# EAGLE board module (EAGLE 7.7.0)
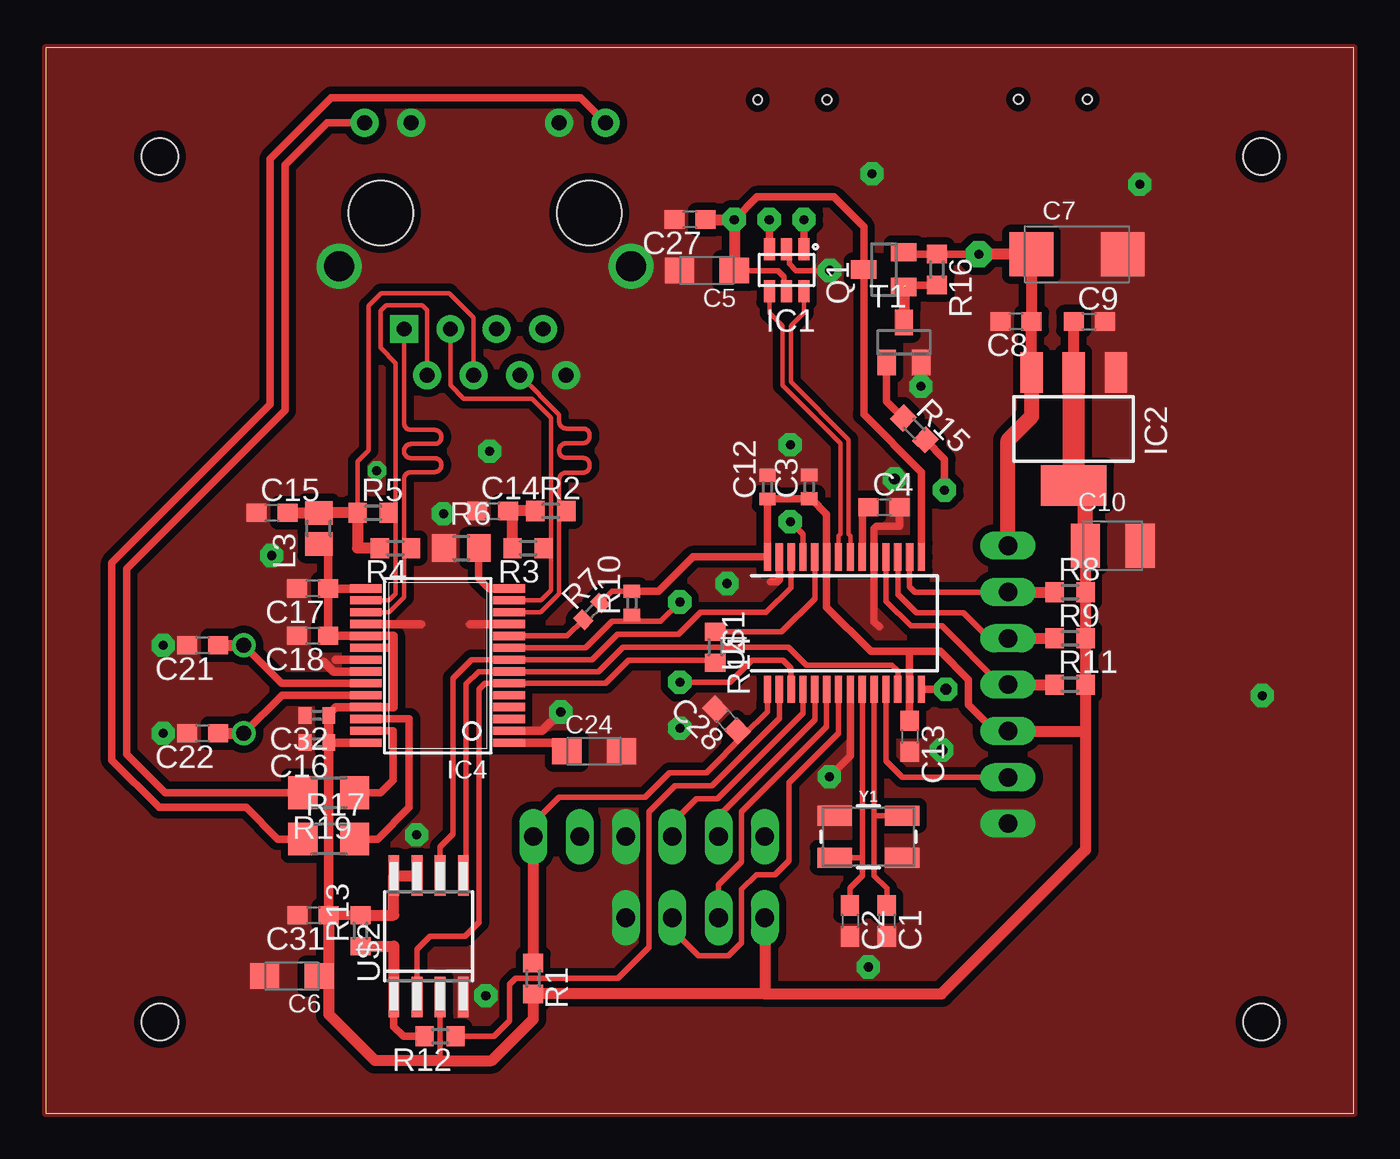
[diagram p0: board, top side]
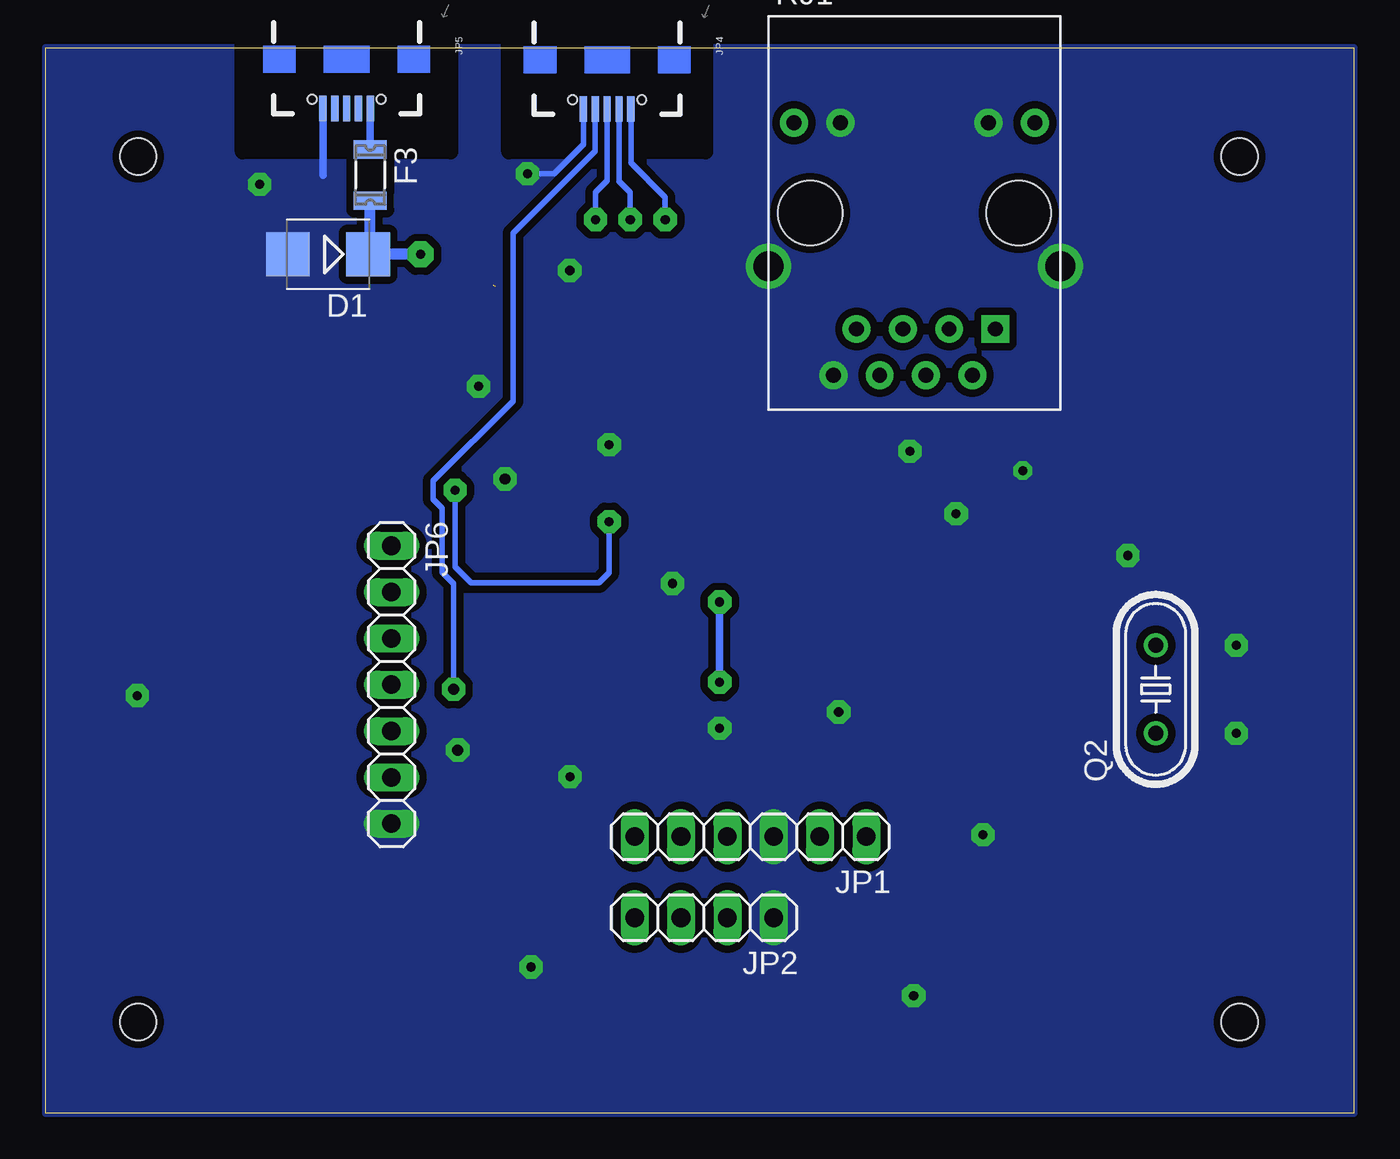
[diagram p1: board, bottom side, seen from below]

Size 71.75 x 58.42 mm. Coordinates in mm from the lower left corner, seen from the top.
Outline: 0,0 71.75,0 71.75,58.42 0,58.42 0,0
Copper layers (1*16): Top 0.035mm / dielectric 1.5mm / Bottom 0.035mm
Design rules "default *": minimum track width 10mil, minimum drill 24mil, track to track 8mil, track to pad 8mil, pad to pad 8mil, via to via 8mil, smd to smd 8mil, copper to edge 0mil, drill to drill 8mil, minimum pad ring 10mil, minimum via ring 8mil, stop-mask expansion 4mil, vias tented up to drill 0mil, thermal gap 10mil
Holes 2 mm at 6.27,52.45 6.27,5 66.68,5 66.68,52.45
tRestrict: area 16.6,20.1 to 18.4,29; area 24.5,20.1 to 26.3,29; area 39.4,29.7 to 48.2,31.3; area 39.4,22.5 to 48.2,24; area 40.3,46.9 to 40.9,47.9
bRestrict: area 35.6,52.7 to 46.4,58.4; area 49.5,52.7 to 61,58.4

## Footprints (pad centres in the part's own frame; a part is rotated, then mirrored left to right if it is on the bottom)
C0603 = smd 1.1 x 1: 1 -0.85,0; 2 0.85,0
C0402 = smd 0.7 x 0.9: 1 -0.65,0; 2 0.65,0
SMC_A = smd 1.6 x 1.4: + -1.5,0; - 1.5,0
SMC_C = smd 2.4 x 2.4: + -2.5,0; - 2.5,0
SMC_B = smd 1.6 x 2.4: + -1.5,0; - 1.5,0
SMB = smd 2.4 x 2.4: A 2.2,0; C -2.2,0
1206L = smd 1 x 1.8: 1 -1.4,0; 2 1.4,0
SOT-23-6L = smd 0.6 x 1.2: 1 -0.95,-2.3; 2 0,-2.3; 3 0.95,-2.3; 4 0.95,0; 5 0,0; 6 -0.95,0
SOT223 = smd 1.219 x 2.235: 1 -2.311,-3.099; 2 0,-3.099; 3 2.311,-3.099 | smd 3.6 x 2.2: TAB 0,3.099
TSSOP28W = smd 0.45 x 1.75: P$1 0,-0.65; P$2 0.65,-0.65; P$3 1.3,-0.65; P$4 1.95,-0.65; P$5 2.6,-0.65; P$6 3.25,-0.65; P$7 3.9,-0.65; P$8 4.55,-0.65; P$9 5.2,-0.65; P$10 5.85,-0.65; P$11 6.5,-0.65; P$12 7.15,-0.65; P$13 7.8,-0.65; P$14 8.45,-0.65; P$15 8.45,7.2; P$16 7.8,7.2; P$17 7.15,7.2; P$18 6.5,7.2; P$19 5.85,7.2; P$20 5.2,7.2; P$21 4.55,7.2; P$22 3.9,7.2; P$23 3.25,7.2; P$24 2.6,7.2; P$25 1.95,7.2; P$26 1.3,7.2; P$27 0.65,7.2; P$28 0,7.2
1X06 = drill 1.016 long: 1 -6.35,0; 2 -3.81,0; 3 -1.27,0; 4 1.27,0; 5 3.81,0; 6 6.35,0
1X04 = drill 1.016 long: 1 -3.81,0; 2 -1.27,0; 3 1.27,0; 4 3.81,0
USB-B-MICRO-SMD_V03 = smd 1.4 x 0.4: D+1 2.7,0; D-1 2.7,0.65; GND1 2.7,-1.3; ID1 2.7,-0.65; VBUS1 2.7,1.3 | hole 0.5: 2.2,1.9; 2.2,-1.9
1X07 = drill 1.016 long: 1 -7.62,0; 2 -5.08,0; 3 -2.54,0; 4 0,0; 5 2.54,0; 6 5.08,0; 7 7.62,0
FB805 = smd 1.3 x 1.5: 1 -0.85,0; 2 0.85,0
SOT23 = smd 1 x 1.4: 1 -0.95,-1.1; 2 0.95,-1.1; 3 0,1.1
HC49/S = drill 0.813: 1 -2.413,0; 2 2.413,0
R0603 = smd 1 x 1.1: 1 -0.85,0; 2 0.85,0
R0805 = smd 1.3 x 1.5: 1 -0.95,0; 2 0.95,0
R0402 = smd 0.7 x 0.9: 1 -0.65,0; 2 0.65,0
R1206 = smd 1.6 x 1.803: 1 -1.422,0; 2 1.422,0
HR911105A = drill 0.813 pad 1.524: G+ 4.953,-6.604; G- 4.953,-4.064; GND -8.89,4.445; NC -6.35,3.175; P4 -8.89,-0.635; P5 -6.35,0.635; RD+ -6.35,-1.905; RD- -8.89,1.905; TD- -8.89,-3.175; Y+ 4.953,6.604; Y- 4.953,4.064 | drill 1.651 pad 2.159: SHIELD0 -2.921,8.001; SHIELD1 -2.921,-8.001 | drill 0.813 pad 1.524 square: TD+ -6.35,-4.445 | hole 3.556: 0,-5.715; 0,5.715
SSOP28 = smd 0.4 x 1.5: 1 -4.225,-3.625; 2 -3.575,-3.625; 3 -2.925,-3.625; 4 -2.275,-3.625; 5 -1.625,-3.625; 6 -0.975,-3.625; 7 -0.325,-3.625; 8 0.325,-3.625; 9 0.975,-3.625; 10 1.625,-3.625; 11 2.275,-3.625; 12 2.925,-3.625; 13 3.575,-3.625; 14 4.225,-3.625; 15 4.225,3.625; 16 3.575,3.625; 17 2.925,3.625; 18 2.275,3.625; 19 1.625,3.625; 20 0.975,3.625; 21 0.325,3.625; 22 -0.325,3.625; 23 -0.975,3.625; 24 -1.625,3.625; 25 -2.275,3.625; 26 -2.925,3.625; 27 -3.575,3.625; 28 -4.225,3.625
SO-08M = smd 0.6 x 2.2: 1 -1.905,-3.33; 2 -0.635,-3.33; 3 0.635,-3.33; 4 1.905,-3.33; 5 1.905,3.33; 6 0.635,3.33; 7 -0.635,3.33; 8 -1.905,3.33
CRYSTAL-SMD-5X3.2-4PAD = smd 1.9 x 1.1: 1 -1.85,-1.15; 2 1.85,-1.15; 3 1.85,1.15; 4 -1.85,1.15

## Placement (x,y rotation side)
C1  [C0603]  46.13,10.54 270 top
C2  [C0603]  44.11,10.54 270 top
C3  [C0402]  41.88,34.34 90 top
C4  [C0603]  45.99,33.22 0 top
C5  [SMC_A]  36.27,46.2 180 top
C6  [SMC_A]  13.51,7.52 180 top
C7  [SMC_C]  56.57,47.09 0 top
C8  [C0603]  53.23,43.41 180 top
C9  [C0603]  57.24,43.41 0 top
C10  [SMC_B]  58.52,31.11 0 top
C12  [C0402]  39.59,34.33 90 top
C13  [C0603]  47.39,20.67 270 top
C14  [C0603]  24.51,33.02 0 top
C15  [C0603]  12.42,32.92 0 top
C16  [C0402]  14.88,20.32 180 top
C17  [C0603]  14.66,28.77 180 top
C18  [C0603]  14.65,26.18 180 top
C21  [C0603]  8.61,25.65 180 top
C22  [C0603]  8.61,20.83 180 top
C24  [SMC_A]  30.08,19.85 0 top
C27  [C0603]  35.33,49 180 top
C28  [C0603]  37.35,21.56 135 top
C31  100nF  [C0603]  14.68,10.86 180 top
C32  [C0402]  14.88,21.82 180 top
D1  [SMB]  56.26,47.09 180 bottom
F3  1206L012  [1206L]  53.95,51.44 270 bottom
IC1  IC_USBLC6-2  [SOT-23-6L]  40.64,45.06 180 top
IC2  LM1117IMPX-3.3  [SOT223]  56.39,37.52 180 top
IC4  ENC28J60  [TSSOP28W]  24.77,20.32 90 top
JP1  [1X06]  33.1,15.16 180 bottom
JP2  [1X04]  35.64,10.72 180 bottom
JP4  USB_MICROB_PLUGCONN-11752  [USB-B-MICRO-SMD_V03]  40.96,57.76 270 bottom
JP5  USB_MICROB_PLUGCONN-11752  [USB-B-MICRO-SMD_V03]  55.24,57.79 270 bottom
JP6  [1X07]  52.78,23.5 270 bottom
L3  [FB805]  14.98,32.07 90 top
Q1  BSS84  [SOT23]  45.97,46.25 90 top
Q2  [HC49/S]  10.87,23.24 90 bottom
R1  [R0603]  26.75,7.39 270 top
R2  [R0603]  27.71,33.02 0 top
R3  [R0603]  26.47,30.99 180 top
R4  [R0603]  19.19,30.99 180 top
R5  [R0603]  17.96,32.92 0 top
R6  [R0805]  22.81,30.99 0 top
R7  [R0402]  29.96,27.52 45 top
R8  [R0603]  56.18,28.57 0 top
R9  [R0603]  56.18,26.04 0 top
R10  [R0402]  32.16,27.97 90 top
R11  [R0603]  56.18,23.5 0 top
R12  0R  [R0603]  21.64,4.22 180 top
R13  10k?  [R0603]  17.27,10.01 90 top
R14  [R0603]  36.73,25.55 270 top
R15  [R0603]  47.65,37.52 315 top
R16  [R0603]  48.9,46.25 270 top
R17  [R1206]  15.53,15.04 0 top
R19  [R1206]  15.53,17.58 180 top
RJ1  HR911105A  [HR911105A]  24.1,49.35 90 bottom
T1  BC847  [SOT23]  47.07,42.27 0 top
U$1  PIC32MX250F128B2  [SSOP28]  43.81,26.87 0 top
U$2  SST25VF016BSO8M  [SO-08M]  21.01,9.7 0 top
Y1  CRYSTAL-GROUNDEDSMD-5X3.2  [CRYSTAL-SMD-5X3.2-4PAD]  45.12,15.16 0 top

## Library data of the parts
C1-C10 C12-C18 C21 C22 C24 C27 C28 C31 C32 R1-R17 R19 = rcl
D1 = diode
F3 = polyfuse-smd_10; MF: Littelfuse; MPN: 1206L012; OC_FARNELL: 1596988; OC_NEWARK: 05M2298
IC1 L3 = dp_devices
IC2 = lm1117
IC4 = microchip
JP1 JP2 JP6 = pinhead
JP4 JP5 = SparkFun-Connectors; PROD_ID: CONN-11752
Q1 = transistor-small-signal
Q2 = crystal; OC_FARNELL: 1667008; OC_NEWARK: unknown
RJ1 = hanrun
T1 = transistor
U$1 = microchip-pic32mx
U$2 = mw
Y1 = SparkFun-Clocks

## Nets
_3V: C3.1 C6.+ C9.1 C10.+ C12.1 C13.1 C16.1 C17.1 C18.1 C31.1 C32.1 IC2.2 IC2.TAB IC4.P$15 IC4.P$19 IC4.P$20 IC4.P$25 IC4.P$28 JP2.4 JP6.5 L3.1 R1.2 R7.2 R8.2 R9.2 R10.2 R11.2 R13.2 U$1.13 U$1.23 U$1.28 U$2.3 U$2.7 U$2.8
_5V: C7.+ C8.1 D1.C F3.2 IC2.3 JP6.1 Q1.2 R16.1
CE: R12.1 U$1.2
CE1: R12.2 R13.1 U$2.1
D_N: IC1.4 U$1.22
D_P: IC1.6 U$1.21
ENC_CS: IC4.P$9 R10.1 U$1.3
ENC_RST: IC4.P$10 R7.1
GND: C1.2 C2.2 C3.2 C4.2 C5.- C6.- C7.- C8.2 C9.2 C10.- C12.2 C13.2 C14.1 C15.1 C16.2 C17.2 C18.2 C21.2 C22.2 C24.- C27.2 C28.2 C31.2 C32.2 D1.A IC1.2 IC2.1 IC4.P$2 IC4.P$11 IC4.P$18 IC4.P$21 IC4.P$22 JP1.3 JP2.1 JP4.GND1 JP5.GND1 JP6.7 R6.1 RJ1.G- RJ1.GND RJ1.SHIELD0 RJ1.SHIELD1 RJ1.Y- T1.2 U$1.8 U$1.19 U$1.27 U$2.4 Y1.2 Y1.4
IO_INT: JP6.2 R8.1 U$1.16
LEDA: IC4.P$27 R19.1
LEDB: IC4.P$26 R17.2
MCLR: C28.1 JP1.1 R1.1 U$1.1
MISO: IC4.P$6 R14.2 U$2.2
MOSI: IC4.P$7 U$1.12 U$2.5
N$2: C14.2 R2.1 R3.2
N$4: R14.1 U$1.24
N$5: R15.1 T1.1
N$6: C15.2 L3.2 R4.2 R5.1 RJ1.P4
N$7: C4.1 U$1.20
N$8: Q1.1 R16.2 T1.3
N$9: IC1.1 JP4.D+1
N$10: IC1.3 JP4.D-1
N$12: IC4.P$14 R6.2
N$14: F3.1 JP5.VBUS1
N$17: C1.1 U$1.10 Y1.3
N$18: C2.1 U$1.9 Y1.1
N$22: C21.1 IC4.P$23 Q2.2
N$23: C22.1 IC4.P$24 Q2.1
N$29: C24.+ IC4.P$1
N$30: R17.1 RJ1.Y+
N$31: R19.2 RJ1.G+
PGEC: JP1.5 U$1.5
PGED: JP1.4 U$1.4
RXD: JP2.3 U$1.6
SCK: IC4.P$8 U$1.26 U$2.6
SCL: JP6.3 R9.1 U$1.17
SDA: JP6.4 R11.1 U$1.18
SIG: JP6.6 U$1.11
TPIN_N: IC4.P$12 R2.2 RJ1.RD-
TPIN_P: IC4.P$13 R3.1 RJ1.RD+
TPOUT_N: IC4.P$16 R5.2 RJ1.TD-
TPOUT_P: IC4.P$17 R4.1 RJ1.TD+
TXD: JP2.2 U$1.7
USBID: JP4.ID1 U$1.14
VBUS: C5.+ C27.1 IC1.5 JP4.VBUS1 Q1.3 U$1.15
VBUSON: R15.2 U$1.25

## Tracks (layer width: path | path; a pad name or v marks a point on that pad's centre or on a via)
_3V
  Top 0.305: U$2.3 21.64,2.88 | R1.2 26.67,6.54 | R7.2 31.05,28.61 R10.2
  Top 0.406: 47.39,25.32 45.26,25.32 42.84,27.75 U$1.23 42.84,32.85 42,33.69 C3.1 39.6,33.69 C12.1 U$1.28 | C6.+ 15.43,7.52 15.53,7.62 | 39.59,30.31 U$1.28 | R10.2 33.62,28.61 35.5,30.5 U$1.28 | 47.39,25.32 U$1.13 C13.1 | 47.39,25.32 49.07,25.32 50.62,23.77 50.62,22.4 52.07,20.95 JP6.5
  Top 0.457: IC4.P$20 19.07,25.52 | 19.07,25.52 19.07,22.27 IC4.P$25 15.89,22.27 15.53,21.91 C32.1 | IC4.P$28 C16.1 | 19.07,25.52 19.07,26.17 IC4.P$19 C18.1 C17.1 | L3.1 15.45,30.74 15.5,30.74 C17.1 | IC4.P$15 C17.1
  Top 0.508: C32.1 C16.1 C31.1 R13.2
  Top 0.61: R13.2 19.1,10.86 U$2.8 U$2.7 | C31.1 15.53,7.62 15.53,5.42 18.07,2.88 21.64,2.88 24.47,2.88 26.75,5.16 R1.2 39.45,6.54 | JP2.4 39.45,6.54 | 39.45,6.54 49.14,6.54 57.03,14.44 57.03,20.95 | C10.+ 57.02,30.48 57.02,28.59 R8.2 R9.2 R11.2 57.03,20.95 | JP6.5 57.03,20.95 | IC2.2 C9.1
  Top 0.813: 57.02,30.48 | C10.+ 57.02,33.78 IC2.TAB
  Top 1.219: IC2.TAB IC2.2
_5V  (via drill 0.5 pad 1.42)
  Top 0.406: Q1.2 47.17,47.1 R16.1 v51.18,47.09
  Top 0.61: 54.09,43.43 C8.1 | IC2.3 C8.1 | C8.1 54.07,43.42 C7.+ v51.18,47.09
  Top 0.813: JP6.1 52.78,36.91 54.08,38.2 IC2.3
  Bottom 0.61: v51.18,47.09 D1.C 53.95,47.2 F3.2
CE
  Top 0.305: U$1.2 40.24,21.65 36.55,17.96 34.52,17.96 33.1,16.54 33.1,9.09 31.39,7.39 25.78,7.39 25.45,7.06 25.45,5.08 24.59,4.22 R12.1
CE1
  Top 0.406: U$2.1 19.1,4.75 19.63,4.22 R12.2
  Top 0.61: R13.1 19.1,9.16 U$2.1
D_N
  Top 0.254: IC1.4 39.69,43.9 40.41,43.18 40.41,39.91 43.59,36.74 43.59,31.75 43.49,31.65 U$1.22
D_P
  Top 0.254: IC1.6 41.59,43.9 40.87,43.18 40.87,40.1 44.04,36.93 44.04,31.75 44.14,31.65 U$1.21
ENC_CS  (via drill 0.5 pad 1.27)
  Top 0.305: IC4.P$9 29.61,25.52 31.06,26.97 32.38,26.97 | 32.38,26.97 33.73,26.97 v34.78,28.03 | 32.38,26.97 32.49,27.08 32.25,27.32 R10.1 | v34.78,23.63 37.53,23.63 38.73,24.84 40.44,24.84 40.89,24.39 U$1.3
  Bottom 0.406: v34.78,23.63 v34.78,28.03
ENC_RST
  Top 0.305: IC4.P$10 28.61,26.17 R7.1
GND  (via drill 0.5 pad 1.02, 0.5 pad 1.27, 0.6 pad 1.27)
  Top 0.305: 42.42,46.2 41.15,46.2 40.79,46.56 40.79,47.21 IC1.2
  Top 0.406: U$1.27 40.24,29.24 40.13,29.13 39.75,29.13 | U$1.8 44.14,19.6 v42.99,18.45 | C4.2 46.84,32.18 45.57,32.18 45.44,32.05 U$1.19 45.44,26.95 45.72,26.67
  Top 0.457: IC4.P$11 23.27,26.82 | IC4.P$18 20.6,26.82 | IC4.P$21 15.9,24.87 | IC4.P$22 15.79,24.22 15.24,24.77 | IC4.P$2 27.23,20.97 v28.26,22
  Bottom 0.305: JP4.GND1 42.26,53.12 43.87,51.51 v45.33,51.51
  Bottom 0.406: JP5.GND1 56.55,51.44
  other vias: 18.16,35.23 6.45,25.65 6.45,20.83 12.4,30.58 21.82,32.87 24.36,36.3 43,46.2 24.14,6.45 37.38,29.05 34.78,21.12 20.35,15.27 45.12,8.02 66.72,22.9 60.01,50.93 46.56,34.77 40.84,36.65 49.15,19.91 48.01,39.85
  pour Top (isolate 0.406, rank 2, no thermals): 0,58.42 0,0 71.75,0 71.75,58.42
  pour Bottom (isolate 0.406, no thermals): 0,58.42 0,0 71.75,0 71.75,58.42
IO_INT
  Top 0.305: U$1.16 47.39,28.86 47.68,28.57 JP6.2
  Top 0.61: JP6.2 R8.1
LEDA
  Top 0.406: IC4.P$27 19.05,20.97 19.05,18.26 18.36,17.58 R19.1
LEDB
  Top 0.406: IC4.P$26 19.94,21.62 19.94,16.76 18.21,15.04 R17.2
MCLR
  Top 0.305: JP1.1 26.75,15.9 28.17,17.32 32.87,17.32 34.21,18.67 36.25,18.67 38.32,20.74 | U$1.1 39.59,22.01 38.32,20.74 | C28.1 38.09,20.96 38.32,20.74
  Top 0.61: JP1.1 R1.1
MISO
  Top 0.305: U$2.2 20.37,8.99 21.08,9.7 23.01,9.7 23.77,10.46 23.77,23.24 24.11,23.57 IC4.P$6 30.71,23.57 31.98,24.84 36.59,24.84 R14.2
MOSI
  Top 0.305: U$2.5 23.06,12.45 23.06,23.54 23.74,24.22 IC4.P$7 30.34,24.22 31.67,25.55 40.74,25.55 41.73,24.56 46.43,24.56 46.74,24.25 U$1.12
N$1
  cutout Bottom: 52.64,52.4 52.64,50.5 55.26,50.5 55.26,52.4
N$2
  Top 0.61: R3.2 25.62,32.84 25.54,32.84 C14.2 R2.1
N$4
  Top 0.305: R14.1 40.37,26.4 42.19,28.22 U$1.24
N$5
  Top 0.406: T1.1 46.12,39.04 R15.1
N$6
  Top 0.254: RJ1.P4 23.47,43.61 22.12,44.96 18.39,44.96 17.7,44.27 17.7,36.35 17.11,35.75 R5.1
  Top 0.61: R4.2 17.11,30.99 R5.1 L3.2 | L3.2 | C15.2 L3.2 | L3.2
N$7
  Top 0.406: U$1.20 44.79,32.88 C4.1
N$8  (1 unrouted)
  Top 0.406: R16.2 47.17,45.4
  Top 0.61: Q1.1 T1.3
N$9  (via drill 0.5 pad 1.27)
  Top 0.406: IC1.1 v41.59,49
  Bottom 0.305: JP4.D+1 40.96,51.12 41.59,50.49 v41.59,49
N$10  (via drill 0.5 pad 1.27)
  Top 0.406: IC1.3 v39.69,49
  Bottom 0.305: JP4.D-1 40.31,51.1 39.69,50.49 v39.69,49
N$12
  Top 0.406: IC4.P$14 24.32,28.77 23.76,29.33 R6.2
N$14
  Bottom 0.406: JP5.VBUS1 F3.1
N$17
  Top 0.305: U$1.10 45.44,16.31 | 45.44,16.31 45.44,13.03 46.13,12.34 C1.1 | Y1.3 45.44,16.31
N$18
  Top 0.305: U$1.9 44.79,14.01 | 44.79,14.01 44.79,13.01 44.11,12.34 C2.1 | Y1.1 44.79,14.01
N$22
  Top 0.406: IC4.P$23 12.96,23.57 Q2.2
  Top 0.61: C21.1 Q2.2
N$23
  Top 0.406: IC4.P$24 12.96,22.92 Q2.1
  Top 0.61: C22.1 Q2.1
N$29
  Top 0.457: IC4.P$1 28.11,20.32 C24.+
N$30
  Top 0.406: RJ1.Y+ 29.34,55.68 15.67,55.68 12.32,52.32 12.32,38.86 3.63,30.18 3.63,19.36 6.22,16.76 11,16.76 12.72,15.04 R17.1
N$31
  Top 0.406: R19.2 6.55,17.58 4.45,19.68 4.45,29.84 13.13,38.53 13.13,51.99 15.44,54.3 RJ1.G+
PGEC
  Top 0.305: U$1.5 42.19,21.57 36.91,16.28 JP1.5
PGED
  Top 0.305: U$1.4 41.54,21.93 36.85,17.25 35.71,17.25 34.37,15.9 JP1.4
RXD
  Top 0.305: U$1.6 42.84,21.2 38.18,16.54 38.18,13.79 36.91,12.52 JP2.3
SCK
  Top 0.305: U$2.6 21.64,14.61 22.35,15.32 22.35,23.85 23.37,24.87 IC4.P$8 29.98,24.87 31.37,26.26 34.72,26.26 35.92,27.46 39.52,27.46 40.89,28.82 U$1.26
SCL
  Top 0.305: U$1.17 46.74,28.44 47.75,27.43 50.34,27.43 51.77,26.01 52.76,26.01 JP6.3
  Top 0.61: JP6.3 R9.1
SDA
  Top 0.305: U$1.18 46.09,28.08 47.45,26.72 49.15,26.72 52.38,23.5 JP6.4
  Top 0.61: JP6.4 R11.1
SIG
  Top 0.305: U$1.11 46.09,19.32 46.99,18.41 JP6.6
TPIN_N
  Top 0.254: IC4.P$12 27.16,27.47 28.17,28.48 28.17,33.05 | RJ1.RD- 28.17,38.3 28.17,37.92 arc90 28.55,37.54 29.46,37.54 arc-90 29.84,37.16 29.84,37.12 arc-90 29.46,36.73 28.55,36.73 arc90 28.17,36.35 28.17,36.31 arc90 28.55,35.93 29.46,35.93 arc-90 29.84,35.55 29.84,35.5 arc-90 29.46,35.12 28.55,35.12 arc90 28.17,34.74 28.17,33.05 | R2.2 28.19,33.02 28.17,33.05
TPIN_P
  Top 0.254: IC4.P$13 27.16,28.12 27.71,28.67 27.71,31.29 | 27.71,31.29 27.71,38.12 26.67,39.17 22.94,39.17 22.2,39.9 RJ1.RD+ | R3.1 27.41,30.99 27.71,31.29
TPOUT_N
  Top 0.254: R5.2 19.2,32.92 | 19.2,32.92 19.2,41.12 18.36,41.96 18.36,43.99 18.67,44.3 20.65,44.3 20.93,44.02 RJ1.TD- | 19.2,32.92 19.2,28.49 18.83,28.12 IC4.P$16
TPOUT_P
  Top 0.254: 19.66,30.89 19.66,28.3 18.83,27.47 IC4.P$17 | R4.1 19.66,30.89 | 19.66,30.89 19.66,34.77 arc-90 20.04,35.15 21.32,35.15 arc90 21.71,35.53 21.71,35.54 arc90 21.32,35.92 20.04,35.92 arc-90 19.66,36.3 19.66,36.31 arc-90 20.04,36.69 21.32,36.69 arc90 21.71,37.08 21.71,37.08 arc90 21.32,37.47 20.04,37.47 arc-90 19.66,37.85 RJ1.TD+
TXD
  Top 0.305: U$1.7 43.49,20.83 40.77,18.11 40.77,13.84 40.01,13.08 38.99,13.08 38.18,12.27 38.18,9.35 37.47,8.64 35.81,8.64 34.37,10.08 JP2.2
USBID  (via drill 0.6 pad 1.27)
  Top 0.406: U$1.14 v49.38,23.25
  Bottom 0.305: JP4.ID1 41.61,52.75 46.13,48.24 46.13,39.04 50.49,34.67 50.49,33.66 50.01,33.17 50.01,29.67 49.38,29.03 v49.38,23.25
VBUS  (via drill 0.5 pad 1.27)
  Top 0.305: IC1.5 40.49,45.21 40.49,45.87 40.16,46.2 C5.+
  Top 0.406: v37.77,49 39.02,50.24 43.23,50.24 44.87,48.6 Q1.3 44.87,38.31 48.04,35.15 U$1.15
  Top 0.61: C27.1 v37.77,49 C5.+
  Bottom 0.305: JP4.VBUS1 39.66,52.1 37.77,50.22 v37.77,49
VBUSON  (via drill 0.5 pad 1.27)
  Top 0.305: U$1.25 41.54,31.74 v40.84,32.44
  Top 0.406: v49.3,34.16 49.3,35.87 R15.2
  Bottom 0.305: v40.84,32.44 40.84,29.64 41.4,29.08 48.41,29.08 49.3,29.97 v49.3,34.16